# Altium PCB CPU01(2).PcbDoc (part 2 of 2)
Units mm, origin at the board's own origin, x right, y up, seen from the top; angles counter-clockwise.
Board outline 153.03 x 96.97 mm, 4 copper layers (Top Layer, GND, VCC, Bottom Layer), stack 0.778 mm thick; 203 components, 157 nets, 813 pads, 622 vias.
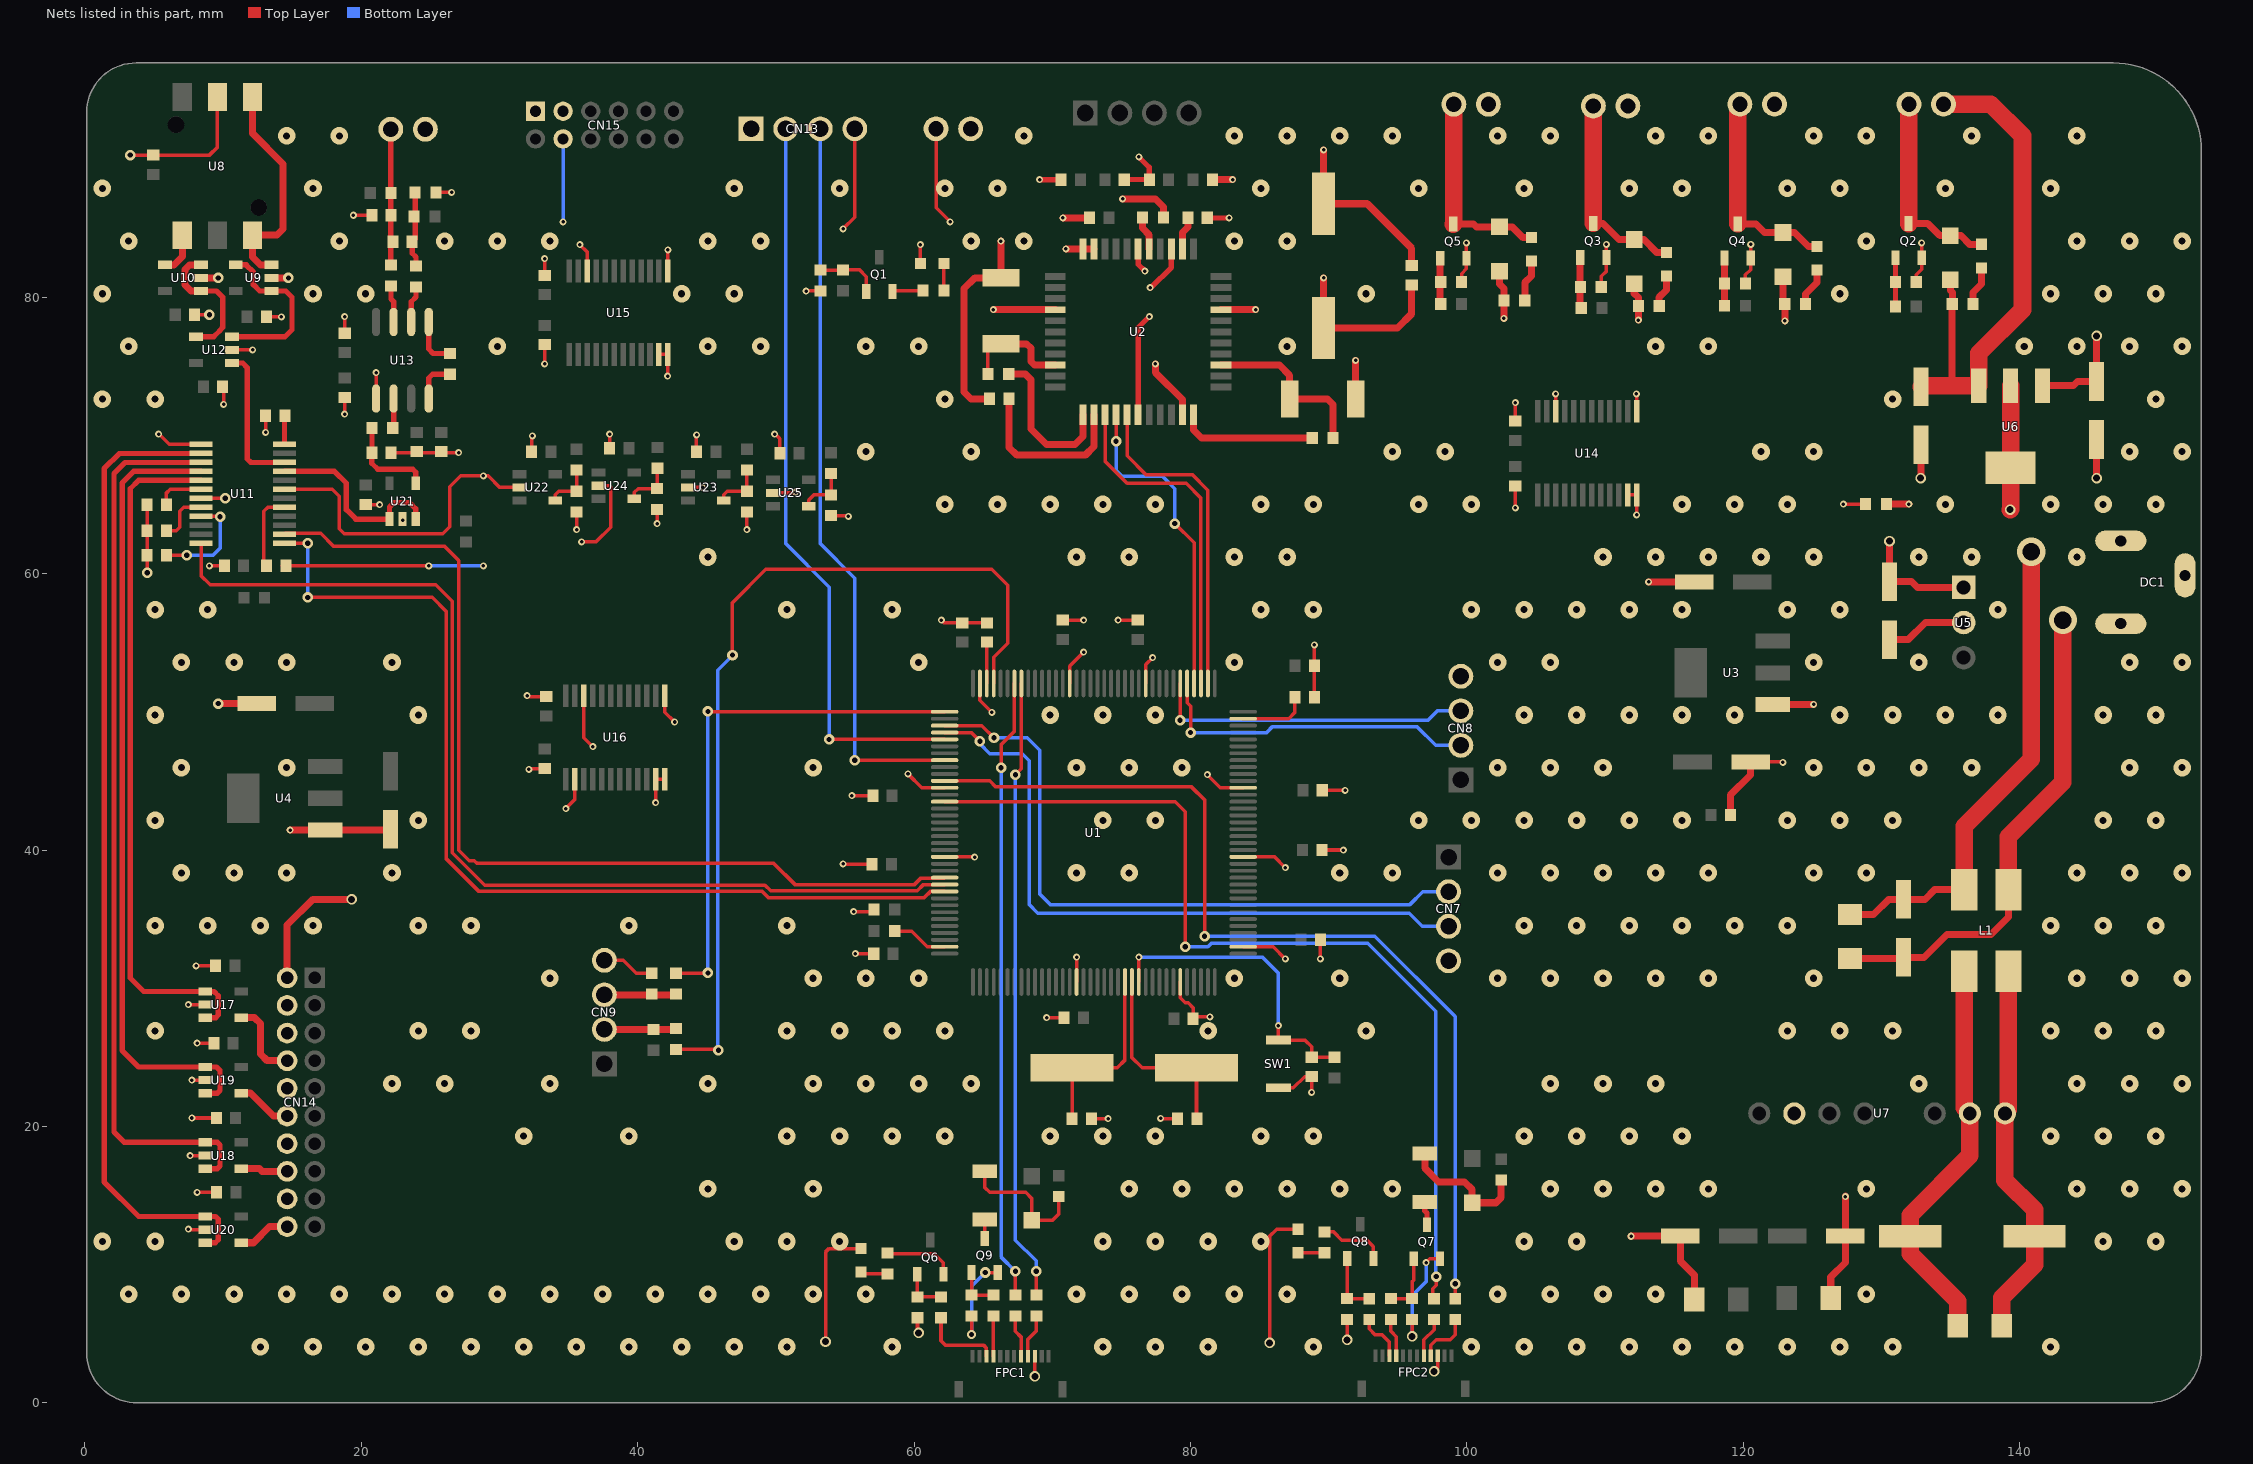
[diagram p4: the nets of this part, all layers, seen from the top]

## Via types
v1: diameter 1.27, hole 0.508, Top Layer to Bottom Layer, 360 vias
v2: diameter 0.508, hole 0.254, Top Layer to Bottom Layer, 161 vias
v3: diameter 0.762, hole 0.381, Top Layer to Bottom Layer, 79 vias
v4: diameter 0.762, hole 0.508, Top Layer to Bottom Layer, 16 vias
v5: diameter 2.032, hole 1.27, Top Layer to Bottom Layer, 4 vias
v6: diameter 1.016, hole 0.381, Top Layer to Bottom Layer, 1 vias
v7: diameter 0.635, hole 0.381, Top Layer to Bottom Layer, 1 vias

## Nets (pads, with @x,y where several pads share a name; then routed paths per layer and width w, separated by ;. In a path a pad name is that pad's centre, name@x,y a point inside that pad or via, vN(x,y) a via of type N, cw(c..) or ccw(c..) an arc to the next point about the centre after c; other vN are vias at no path point) (continued)
DGND: C1.2 C2.2 C3.2 C4.2 C5.2 C6.2 C7.2 C8.2 C9.2 C10.2 C11.2 C12.2 C13.2 C14.2 C15.2 C16.2 C17.2 C28.2 C30.2 C32.2 C35.2 C62.1 C63.2 C64.1 C65.2 C66.1 C67.2 C72.1 C73.1 C74.1 C75.1 CN7.4 CN8.4 CN9.4 CN12.1 CN13.4 CN14.2 CN15.8 FPC1.3 FPC2.3 LED1.1 LED2.1 LED3.1 Q7.2 Q9.2 R2.2 R8.1 R10.1 R28.2 R43.1 R47.1 R53.1 R55.1 R57.1 R58.1 R61.1 R62.1 SW1.1 U1.16 U1.31 U1.38 U1.51 U1.61 U1.83 U1.94 U1.107 U1.120 U1.130 U3.1 U11.7 U14.11 U14.12 U14.13 U14.22 U15.11 U15.12 U15.13 U15.22 U16.2 U16.11 U16.12 U16.13 U16.22 U22.2 U23.2 U24.2 U25.2 | length 234.2
  Top Layer w0.254: C35.2@14.289,60.579 C35.2@14.543,60.579 v2(24.884,60.579) ; U11.7@14.453,66.111 17.901,66.111 18.402,65.61 18.402,63.27 18.782,62.89 25.908,62.89 26.416,63.398 26.416,66.294 27.209,67.087 v2(28.829,67.087) 29.179,67.087 30.019,66.247 U22.2@31.444,66.247 ; v2(32.004,51.181) 32.066,51.119 C63.2@33.401,51.119 ; v2(32.131,45.847) 32.069,45.909 C62.1@33.274,45.909 ; C72.1@32.32,68.834 32.32,69.912 v2(32.385,69.977) ; v2(33.274,75.184) C66.1@33.274,76.581 ; C67.2@33.274,81.599 v2(33.274,82.804) ; v2(34.805,43.014) 35.455,43.664 U16.2@35.455,45.136 ; v2(35.585,63.195) R57.1@35.585,64.462 ; v2(35.814,83.82) 36.344,83.29 U15.22@36.344,81.915 ; v2(35.941,62.303) 36.979,62.303 38.055,63.379 38.055,66.294 37.975,66.374 U24.2@37.159,66.374 ; U16.22@36.105,51.181 36.105,48.133 36.74,47.498 v2(36.755,47.498) ; CN9.4@37.592,32.035 38.958,32.035 39.894,31.099 R8.1@41.021,31.099 ; C74.1@37.97,69.088 37.97,70.101 v2(37.973,70.104) ; v2(41.305,43.434) U16.11@41.305,45.136 U16.12@41.955,45.136 ; v2(41.402,63.627) R61.1@41.402,64.661 ; U15.11@41.544,75.87 U15.12@42.194,75.87 42.194,74.338 v2(42.164,74.308) ; U16.13@41.955,51.181 41.955,49.993 v2(42.672,49.276) ; U15.13@42.194,81.915 v2(42.194,83.439) ; U23.2@43.636,66.247 v2(44.704,66.247) ; C73.1@44.258,68.834 44.258,70.048 v2(44.263,70.053) ; v2(47.904,63.19) R58.1@47.904,64.462 ; U25.2@49.784,65.847 51.369,65.847 v2(51.435,65.913) ; v2(49.911,70.104) 49.973,70.104 50.289,69.788 C75.1@50.289,68.707 ; v2(52.197,80.457) 52.204,80.464 R10.1@53.238,80.464 ; v4(53.594,4.445) 53.594,10.922 53.848,11.176 LED2.1@56.159,11.176 ; R62.1@54,64.208 55.198,64.208 v2(55.245,64.161) ; v2(54.864,39.014) 54.889,38.989 C16.2@56.958,38.989 ; v2(54.864,84.963) 55.713,85.812 CN13.4@55.713,92.202 ; v2(55.499,43.942) C15.2@57.02,43.942 ; v2(55.626,35.56) 55.626,35.539 R2.2@57.094,35.539 ; v2(55.753,32.512) 55.755,32.514 C17.2@57.085,32.514 ; v2(59.563,45.514) 60.563,44.514 U1.120@62.214,44.514 ; R43.1@60.251,6.169 60.251,5.154 v4(60.325,5.08) ; LED1.1@60.452,82.448 v2(60.452,83.82) ; CN12.1@61.595,92.202 61.595,86.487 v2(62.611,85.471) ; v2(61.976,56.642) 62.165,56.453 C14.2@63.5,56.453 C4.2@65.278,56.453 ; U1.130@62.214,39.514 64.372,39.514 v2(64.389,39.497) ; v7(64.16,4.953) R55.1@64.16,6.296 ; U1.107@64.764,52.064 64.764,50.846 v2(65.637,49.973) ; v3(65.151,9.441) Q9.2@66.062,9.441 ; v4(68.742,1.927) FPC1.3@68.742,3.381 ; v2(69.596,27.879) C6.2@70.866,27.879 ; C13.2@70.764,56.645 v2(72.266,56.645) ; U1.94@71.264,52.064 71.264,53.326 v2(72.266,54.328) ; U1.16@71.764,30.464 v2(71.764,32.258) ; C2.2@72.836,20.574 74.038,20.574 v2(74.041,20.577) ; v2(74.764,56.642) 74.767,56.645 C12.2@76.2,56.645 ; U1.83@76.764,52.064 76.764,53.433 v2(77.264,53.933) ; v2(77.851,20.599) 77.876,20.574 C3.2@79.064,20.574 ; U1.31@79.264,30.464 79.264,29.321 79.629,28.956 79.838,28.956 80.188,28.606 80.188,28.587 80.202,28.573 80.202,27.94 v2(81.407,27.94) ; v2(81.218,45.466) 82.17,44.514 U1.61@83.814,44.514 ; U1.38@83.814,33.014 85.981,33.014 v2(86.864,32.131) ; U1.51@83.814,39.514 86.085,39.514 v2(86.864,38.735) ; v4(85.725,4.345) 85.725,12.065 86.233,12.573 LED3.1@87.782,12.573 ; SW1.1@86.36,22.81 87.453,22.81 88.262,23.619 C1.2@88.773,23.619 v2(88.773,22.479) ; C5.2@88.965,51.054 88.965,54.861 v2(88.968,54.864) ; v2(89.408,32.131) 89.411,32.134 C8.2@89.411,33.514 ; C9.2@89.514,40.014 91.05,40.014 v2(91.059,40.005) ; C10.2@89.538,44.323 v2(91.186,44.323) ; v4(91.338,4.564) R53.1@91.338,6.042 ; v4(96.037,4.826) R47.1@96.037,6.042 ; v2(97.052,10.16) 97.322,10.43 Q7.2@98.066,10.43 ; v4(97.638,2.286) 97.893,2.541 FPC2.3@97.893,3.429 ; v2(103.505,64.77) C64.1@103.505,66.356 ; C65.2@103.505,71.058 v2(103.505,72.39) ; U14.22@106.433,71.755 v2(106.433,73.025) ; U14.11@111.633,65.71 U14.12@112.283,65.71 v2(112.283,64.262) ; v2(112.268,73.025) 112.283,73.01 U14.13@112.283,71.755 ; C32.2@120.535,46.383 122.848,46.383 v2(122.876,46.355) ; v2(127.254,65.049) R28.2@128.849,65.049
  Top Layer w0.508: CN14.2@14.637,30.765 14.637,34.576 16.51,36.449 v4(19.304,36.449) ; v2(113.157,59.422) 113.171,59.408 C28.2@116.447,59.408 ; C30.2@119.064,42.545 119.064,43.983 120.535,45.453 C32.2@120.535,46.383 ; U3.1@122.145,50.532 125.081,50.532 v2(125.095,50.546)
  Bottom Layer w0.254: v2(24.884,60.579) v2(28.829,60.579) ; v2(34.608,85.471) CN15.8@34.608,91.472 ; v7(64.16,4.953) 64.16,8.45 v3(65.151,9.441) ; v4(96.037,4.826) 96.037,7.772 97.052,8.787 v2(97.052,10.16)
  other v1: 12.7,4.064 16.51,4.064 20.32,4.064 24.13,4.064 27.94,4.064 31.75,4.064 35.56,4.064 39.37,4.064 43.18,4.064 46.99,4.064 50.8,4.064 58.42,4.064 73.66,4.064 77.47,4.064 81.28,4.064 88.9,4.064 100.33,4.064 104.14,4.064 107.95,4.064 111.76,4.064 115.57,4.064 119.38,4.064 123.19,4.064 127,4.064 130.81,4.064 142.24,4.064 3.175,7.874 6.985,7.874 10.795,7.874 14.605,7.874 18.415,7.874 22.225,7.874 26.035,7.874 29.845,7.874 33.655,7.874 37.465,7.874 41.275,7.874 45.085,7.874 48.895,7.874 52.705,7.874 56.515,7.874 71.755,7.874 75.565,7.874 79.375,7.874 83.185,7.874 86.995,7.874 102.235,7.874 106.045,7.874 109.855,7.874 113.665,7.874 128.905,7.874 1.27,11.684 5.08,11.684 46.99,11.684 50.8,11.684 54.61,11.684 73.66,11.684 77.47,11.684 81.28,11.684 85.09,11.684 104.14,11.684 107.95,11.684 146.05,11.684 149.86,11.684 45.085,15.494 52.705,15.494 75.565,15.494 79.375,15.494 83.185,15.494 86.995,15.494 90.805,15.494 94.615,15.494 106.045,15.494 109.855,15.494 113.665,15.494 117.475,15.494 128.905,15.494 144.145,15.494 147.955,15.494 151.765,15.494 31.75,19.304 39.37,19.304 50.8,19.304 54.61,19.304 58.42,19.304 62.23,19.304 69.85,19.304 73.66,19.304 77.47,19.304 85.09,19.304 88.9,19.304 104.14,19.304 107.95,19.304 111.76,19.304 115.57,19.304 142.24,19.304 146.05,19.304 149.86,19.304 22.225,23.114 26.035,23.114 33.655,23.114 45.085,23.114 52.705,23.114 56.515,23.114 60.325,23.114 64.135,23.114 106.045,23.114 109.855,23.114 113.665,23.114 132.715,23.114 144.145,23.114 147.955,23.114 151.765,23.114 5.08,26.924 24.13,26.924 27.94,26.924 50.8,26.924 54.61,26.924 58.42,26.924 62.23,26.924 81.28,26.924 92.71,26.924 123.19,26.924 127,26.924 130.81,26.924 142.24,26.924 146.05,26.924 149.86,26.924 33.655,30.734 52.705,30.734 56.515,30.734 60.325,30.734 83.185,30.734 90.805,30.734 102.235,30.734 106.045,30.734 109.855,30.734 113.665,30.734 117.475,30.734 125.095,30.734 144.145,30.734 147.955,30.734 151.765,30.734 5.08,34.544 8.89,34.544 12.7,34.544 16.51,34.544 24.13,34.544 27.94,34.544 39.37,34.544 50.8,34.544 104.14,34.544 107.95,34.544 111.76,34.544 115.57,34.544 119.38,34.544 123.19,34.544 142.24,34.544 146.05,34.544 149.86,34.544 6.985,38.354 10.795,38.354 14.605,38.354 22.225,38.354 71.755,38.354 75.565,38.354 90.805,38.354 94.615,38.354 102.235,38.354 106.045,38.354 109.855,38.354 113.665,38.354 117.475,38.354 125.095,38.354 128.905,38.354 144.145,38.354 147.955,38.354 151.765,38.354 5.08,42.164 24.13,42.164 73.66,42.164 77.47,42.164 96.52,42.164 100.33,42.164 104.14,42.164 107.95,42.164 111.76,42.164 115.57,42.164 123.19,42.164 127,42.164 130.81,42.164 146.05,42.164 149.86,42.164 6.985,45.974 14.605,45.974 52.705,45.974 71.755,45.974 75.565,45.974 79.375,45.974 102.235,45.974 106.045,45.974 109.855,45.974 125.095,45.974 128.905,45.974 132.715,45.974 136.525,45.974 147.955,45.974 151.765,45.974 5.08,49.784 24.13,49.784 69.85,49.784 73.66,49.784 77.47,49.784 104.14,49.784 107.95,49.784 111.76,49.784 115.57,49.784 119.38,49.784 127,49.784 130.81,49.784 134.62,49.784 138.43,49.784 146.05,49.784 149.86,49.784 6.985,53.594 10.795,53.594 14.605,53.594 22.225,53.594 60.325,53.594 83.185,53.594 102.235,53.594 106.045,53.594 125.095,53.594 132.715,53.594 147.955,53.594 151.765,53.594 5.08,57.404 8.89,57.404 50.8,57.404 58.42,57.404 85.09,57.404 88.9,57.404 100.33,57.404 104.14,57.404 107.95,57.404 111.76,57.404 115.57,57.404 123.19,57.404 127,57.404 138.43,57.404 45.085,61.214 71.755,61.214 75.565,61.214 83.185,61.214 86.995,61.214 109.855,61.214 113.665,61.214 117.475,61.214 121.285,61.214 125.095,61.214 132.715,61.214 136.525,61.214 144.145,61.214 62.23,65.024 66.04,65.024 69.85,65.024 73.66,65.024 77.47,65.024 85.09,65.024 88.9,65.024 96.52,65.024 100.33,65.024 115.57,65.024 119.38,65.024 123.19,65.024 134.62,65.024 142.24,65.024 146.05,65.024 149.86,65.024 56.515,68.834 64.135,68.834 94.615,68.834 98.425,68.834 121.285,68.834 125.095,68.834 147.955,68.834 151.765,68.834 1.27,72.644 5.08,72.644 62.23,72.644 130.81,72.644 149.86,72.644 3.175,76.454 29.845,76.454 45.085,76.454 48.895,76.454 56.515,76.454 60.325,76.454 86.995,76.454 113.665,76.454 117.475,76.454 140.335,76.454 144.145,76.454 147.955,76.454 151.765,76.454 1.27,80.264 16.51,80.264 20.32,80.264 43.18,80.264 46.99,80.264 92.71,80.264 127,80.264 142.24,80.264 146.05,80.264 149.86,80.264 3.175,84.074 18.415,84.074 26.035,84.074 29.845,84.074 33.655,84.074 45.085,84.074 48.895,84.074 64.135,84.074 67.945,84.074 83.185,84.074 86.995,84.074 128.905,84.074 144.145,84.074 147.955,84.074 151.765,84.074 1.27,87.884 16.51,87.884 46.99,87.884 54.61,87.884 62.23,87.884 66.04,87.884 85.09,87.884 96.52,87.884 104.14,87.884 111.76,87.884 115.57,87.884 123.19,87.884 127,87.884 134.62,87.884 142.24,87.884 14.605,91.694 18.415,91.694 67.945,91.694 83.185,91.694 86.995,91.694 90.805,91.694 94.615,91.694 102.235,91.694 106.045,91.694 113.665,91.694 117.475,91.694 125.095,91.694 128.905,91.694 136.525,91.694 144.145,91.694
Linght_AD1: CN14.8 U17.4 | length 5.9
  Top Layer w0.508: U17.4@11.311,27.879 12.276,27.879 12.7,27.455 12.7,25.261 13.196,24.765 CN14.8@14.637,24.765
Linght_AD1I: U11.17 U17.1 U17.3 | length 50.1
  Top Layer w0.381: U11.17@8.407,66.761 3.888,66.761 3.281,66.154 3.281,30.755 4.257,29.779 U17.1@8.711,29.779 9.337,29.779 9.652,29.464 9.652,28.067 9.464,27.879 U17.3@8.711,27.879
Linght_AD2: CN14.12 U19.4 | length 4
  Top Layer w0.508: U19.4@11.311,22.418 11.999,22.418 13.652,20.765 CN14.12@14.637,20.765
Linght_AD2I: U11.16 U19.1 U19.3 | length 57.4
  Top Layer w0.381: U11.16@8.407,67.411 3.53,67.411 2.697,66.578 2.697,25.497 3.876,24.318 U19.1@8.711,24.318 9.53,24.318 9.779,24.069 9.779,22.606 9.591,22.418 U19.3@8.711,22.418
Linght_AD3: CN14.16 U18.4 | length 3.4
  Top Layer w0.508: U18.4@11.311,16.957 12.634,16.957 12.826,16.765 CN14.16@14.637,16.765
Linght_AD3I: U11.15 U18.1 U18.3 | length 65
  Top Layer w0.381: U11.15@8.407,68.061 2.91,68.061 2.113,67.264 2.113,19.604 2.86,18.857 U18.1@8.711,18.857 9.591,18.857 9.779,18.669 9.779,17.145 9.591,16.957 U18.3@8.711,16.957
Linght_AD4: CN14.20 U20.4 | length 3.8
  Top Layer w0.508: U20.4@11.311,11.594 12.202,11.594 13.372,12.765 CN14.20@14.637,12.765
Linght_AD4I: U11.14 U20.1 U20.3 | length 71
  Top Layer w0.381: U11.14@8.407,68.711 2.498,68.711 1.397,67.61 1.397,16.002 3.904,13.495 U20.1@8.711,13.495 9.46,13.495 9.652,13.303 9.652,11.811 9.436,11.595 U20.3@8.711,11.595
NetBUZZER1_1: BUZZER1.1 D5.2 R40.1 | length 9.6
  Top Layer w0.508: BUZZER1.1@96.957,18.042 96.957,16.997 97.952,16.002 99.822,16.002 100.39,15.434 D5.2@100.39,14.488 102.118,14.488 102.489,14.859 R40.1@102.489,16.129
NetBUZZER1_2: BUZZER1.2 Q7.3 | length 1.7
  Top Layer w0.381: BUZZER1.2@96.957,14.542 96.957,13.914 97.116,13.755 Q7.3@97.116,12.9
NetBUZZER2_1: BUZZER2.1 D6.2 R49.1 | length 9.9
  Top Layer w0.254: BUZZER2.1@65.119,16.772 65.119,15.588 65.467,15.24 68.072,15.24 68.513,14.799 D6.2@68.513,13.218 70.02,13.218 70.472,13.67 R49.1@70.472,14.932
NetBUZZER2_2: BUZZER2.2 Q9.3 | length 1.4
  Top Layer w0.254: Q9.3@65.112,11.911 65.112,13.265 BUZZER2.2@65.119,13.272
NetC2_1: C2.1 U1.23 X1.2 | length 13.4
  Top Layer w0.254: C2.1@71.436,20.574 71.439,20.577 X1.2@71.439,24.257 74.704,24.257 75.264,24.817 U1.23@75.264,30.464
NetC3_1: C3.1 U1.24 X1.1 | length 14.1
  Top Layer w0.254: U1.24@75.764,30.464 75.764,24.999 76.506,24.257 X1.1@80.439,24.257 80.439,20.599 C3.1@80.464,20.574
NetC4_1: C4.1 U1.106 | length 3
  Top Layer w0.254: U1.106@65.264,52.064 65.264,55.039 C4.1@65.278,55.053
NetC5_1: C5.1 U1.71 | length 5
  Top Layer w0.254: U1.71@83.814,49.514 87.106,49.514 87.565,49.973 C5.1@87.565,51.054
NetC18_2: C18.2 U2.35 | length 2.4
  Top Layer w0.508: U2.35@79.419,83.508 79.419,84.699 79.818,85.098 C18.2@79.818,85.75
NetC23_2: C23.2 U2.13 | length 12.4
  Top Layer w0.508: C23.2@66.867,72.651 66.867,69.15 67.437,68.58 72.39,68.58 73.019,69.209 U2.13@73.019,71.508
NetC35_1: C35.1 U11.5 | length 5.6
  Top Layer w0.254: C35.1@13.146,60.579 12.954,60.771 12.954,64.516 13.249,64.811 U11.5@14.453,64.811
NetC43_1: C43.1 C44.2 L1.3 U7.2 | length 29
  Top Layer w1.27: C44.2@135.509,5.588 135.509,7.366 132.08,10.795 C43.1@132.08,12.065 132.08,13.589 136.398,17.907 U7.2@136.398,20.955 135.992,21.361 L1.3@135.992,31.242
NetC43_2: C43.2 C44.1 L1.4 U7.1 | length 27.6
  Top Layer w1.27: C44.1@138.694,5.588 138.694,7.63 141.08,10.016 C43.2@141.08,12.065 141.08,13.987 138.938,16.129 U7.1@138.938,20.955 139.192,21.209 L1.4@139.192,31.242
NetC51_2: C51.2 U11.20 | length 3.9
  Top Layer w0.254: C51.2@5.907,63.119 6.604,63.119 6.858,63.373 6.858,64.516 7.153,64.811 U11.20@8.407,64.811
NetC52_1: C52.1 U11.18 | length 3.4
  Top Layer w0.254: C52.1@5.907,65.01 5.907,65.851 6.167,66.111 U11.18@8.407,66.111
NetC57_1: C57.1 C59.1 CN11.1 R35.2 R36.1 | length 9.8
  Top Layer w0.381: CN11.1@22.136,92.168 22.136,82.357 R36.1@22.152,82.341
NetC57_2: C57.2 R34.2 R38.1 R39.1 | length 5.5
  Top Layer w0.381: R38.1@23.899,87.596 23.899,84.252 C57.2@23.687,84.04 23.687,83.192 23.956,82.923 R39.1@23.956,82.27
NetCN9_2: CN9.2 R4.1 R5.1 | length 5.1
  Top Layer w0.508: CN9.2@37.592,27.035 R4.1@41.148,27.035 R5.1@42.72,27.035
NetCN9_3: CN9.3 R7.1 R8.2 | length 5.1
  Top Layer w0.508: CN9.3@37.592,29.535 R7.1@42.716,29.535
NetFPC1_4: FPC1.4 R44.2 | length 3.2
  Top Layer w0.254: FPC1.4@68.242,3.381 68.242,4.615 68.86,5.233 R44.2@68.86,6.294
NetFPC1_5: FPC1.5 R45.2 | length 3.1
  Top Layer w0.254: R45.2@67.336,6.294 67.336,5.181 67.742,4.775 FPC1.5@67.742,3.381
NetFPC2_4: FPC2.4 R48.2 | length 3.9
  Top Layer w0.254: FPC2.4@97.393,3.429 97.393,4.175 97.79,4.572 98.806,4.572 99.162,4.928 R48.2@99.162,6.04
NetFPC2_5: FPC2.5 R50.2 | length 2.9
  Top Layer w0.254: FPC2.5@96.893,3.429 96.893,4.564 97.638,5.309 R50.2@97.638,6.04
NetLED1_2: LED1.2 R9.1 | length 2
  Top Layer w0.254: LED1.2@62.154,82.448 62.154,80.492 R9.1@62.157,80.489
NetLED2_2: LED2.2 R42.1 | length 2
  Top Layer w0.254: LED2.2@56.159,9.474 56.29,9.344 R42.1@58.064,9.344
NetLED3_2: LED3.2 R52.1 | length 1.9
  Top Layer w0.254: LED3.2@87.782,10.871 87.786,10.868 R52.1@89.687,10.868
NetQ1_1: Q1.1 R6.1 R10.2 | length 4.6
  Top Layer w0.254: R10.2@53.238,81.971 54.843,81.971 R6.1@54.864,81.991 56.058,81.991 56.542,81.507 Q1.1@56.542,80.434
NetQ1_2: Q1.2 R9.2 | length 2.2
  Top Layer w0.254: Q1.2@58.442,80.434 58.498,80.489 R9.2@60.65,80.489
NetQ2_1: Q2.1 R13.1 R15.1 | length 3.5
  Top Layer w0.381: R13.1@131.015,79.35 R15.1@131.015,81.128 Q2.1@131.015,82.872
NetQ3_1: Q3.1 R14.2 R16.1 | length 3.7
  Top Layer w0.508: Q3.1@108.204,82.88 108.204,79.294 R14.2@108.275,79.222
NetQ4_1: Q4.1 R19.2 R21.1 | length 3.5
  Top Layer w0.508: Q4.1@118.645,82.847 118.651,82.842 R19.2@118.651,79.397
NetQ5_1: Q5.1 R20.2 R22.1 | length 3.3
  Top Layer w0.508: R20.2@98.071,79.564 Q5.1@98.071,82.839
NetQ6_1: Q6.1 R41.1 R43.2 | length 3.3
  Top Layer w0.254: Q6.1@60.225,9.314 60.225,7.701 R43.2@60.251,7.676 60.252,7.674 R41.1@61.951,7.674
NetQ6_2: Q6.2 R42.2 | length 5.2
  Top Layer w0.254: R42.2@58.064,10.851 58.12,10.795 61.468,10.795 62.125,10.138 Q6.2@62.125,9.314
NetQ7_1: Q7.1 R46.1 R47.2 | length 4.5
  Top Layer w0.254: R46.1@94.512,7.549 R47.2@96.037,7.549 96.037,8.763 96.166,8.892 Q7.1@96.166,10.43
NetQ8_1: Q8.1 R51.1 R53.2 | length 4.5
  Top Layer w0.254: Q8.1@91.34,10.457 91.338,10.455 R53.2@91.338,7.549 91.34,7.547 R51.1@92.939,7.547
NetQ8_2: Q8.2 R52.2 | length 4.9
  Top Layer w0.254: R52.2@89.687,12.375 90.368,12.375 90.959,11.784 92.775,11.784 93.24,11.318 Q8.2@93.24,10.457
NetQ9_1: Q9.1 R54.1 R55.2 | length 3.2
  Top Layer w0.254: Q9.1@64.162,9.441 64.16,9.439 R55.2@64.16,7.803 64.162,7.801 R54.1@65.761,7.801
NetR3_2: R3.2 U1.143 | length 4.1
  Top Layer w0.254: R3.2@58.603,34.138 59.842,34.138 60.966,33.014 U1.143@62.214,33.014
NetR11_1: R11.1 RLED1.2 | length 2.4
  Top Layer w0.508: R11.1@113.919,79.375 113.919,80.01 114.452,80.543 RLED1.2@114.452,81.559
NetR12_1: R12.1 RLED2.2 | length 2.9
  Top Layer w0.508: R12.1@136.63,79.527 136.63,80.369 137.236,80.975 RLED2.2@137.236,82.144
NetR17_1: R17.1 RLED3.2 | length 2.8
  Top Layer w0.508: R17.1@124.514,79.527 124.514,80.256 125.349,81.091 RLED3.2@125.349,81.991
NetR18_1: R18.1 RLED4.2 | length 3
  Top Layer w0.508: R18.1@104.194,79.774 104.194,81.072 104.673,81.552 RLED4.2@104.673,82.619
NetR23_2: R23.2 U2.38 | length 2.5
  Top Layer w0.508: R23.2@76.534,85.775 76.534,85.01 77.019,84.525 U2.38@77.019,83.508
NetR24_1: R24.1 R25.2 U2.9 | length 8.3
  Top Layer w0.254: R25.2@65.349,74.447 65.349,76.638 R24.1@66.29,76.638
  Top Layer w0.508: R24.1@66.29,76.638 68.142,76.638 68.453,76.327 68.453,75.371 68.716,75.108 U2.9@70.219,75.108
NetR25_1: R25.1 U2.12 | length 11.4
  Top Layer w0.508: R25.1@66.856,74.447 68.047,74.447 68.453,74.041 68.453,70.485 69.596,69.342 71.64,69.342 72.219,69.921 U2.12@72.219,71.508
NetR26_1: R26.1 R27.2 U2.25 | length 12.7
  Top Layer w0.508: U2.25@82.219,75.108 86.436,75.108 87.179,74.365 R26.1@87.179,72.648 89.912,72.648 90.321,72.239 R27.2@90.321,69.825
NetR27_1: R27.1 U2.22 | length 9.9
  Top Layer w0.508: U2.22@80.219,71.508 80.219,70.403 80.797,69.825 R27.1@88.814,69.825
NetR31_1: R31.1 U11.21 | length 7.8
  Top Layer w0.254: R31.1@5.907,61.341 v3(7.366,61.341) ; U11.21@8.407,64.161 9.756,64.161 v3(9.782,64.135)
  Bottom Layer w0.254: v3(7.366,61.341) 9.274,61.341 9.782,61.849 v3(9.782,64.135)
NetR32_1: R32.1 R57.2 U22.4 | length 3.6
  Top Layer w0.254: U22.4@34.044,65.297 34.044,65.728 34.285,65.969 R57.2@35.585,65.969 R32.1@35.585,67.51
NetR33_1: R33.1 U13.8 | length 3.1
  Top Layer w0.381: U13.8@24.884,72.68 24.884,74.16 25.164,74.44 R33.1@26.416,74.44
NetR33_2: R33.2 U13.1 | length 3.6
  Top Layer w0.381: U13.1@24.884,78.225 24.884,76.263 25.201,75.946 R33.2@26.416,75.946
NetR36_2: R36.2 U13.3 | length 2.7
  Top Layer w0.381: R36.2@22.152,80.834 22.152,79.891 22.344,79.699 U13.3@22.344,78.225
NetR37_1: R37.1 U13.6 | length 2.2
  Top Layer w0.381: R37.1@22.279,70.536 22.344,70.601 U13.6@22.344,72.68
NetR39_2: R39.2 U13.2 | length 2.7
  Top Layer w0.381: U13.2@23.614,78.225 23.614,79.683 23.956,80.025 R39.2@23.956,80.763
NetR56_1: R56.1 R58.2 U23.4 | length 3.7
  Top Layer w0.254: U23.4@46.236,65.297 46.236,65.722 46.482,65.969 R58.2@47.904,65.969 R56.1@47.904,67.51
NetR59_1: R59.1 R61.2 U24.4 | length 3.7
  Top Layer w0.254: U24.4@39.759,65.424 39.759,65.89 40.036,66.167 R61.2@41.402,66.167 41.402,67.587 R59.1@41.452,67.637
NetR60_1: R60.1 R62.2 U25.4 | length 3.8
  Top Layer w0.254: U25.4@52.384,64.897 52.384,65.338 52.761,65.715 R62.2@54,65.715 R60.1@54,67.256
NRST: C1.1 R1.1 SW1.2 U1.25 | length 22.2
  Top Layer w0.254: U1.25@76.264,30.464 v2(76.264,32.258) ; v2(86.36,27.305) SW1.2@86.36,26.26 88.294,26.26 88.773,25.781 C1.1@88.773,25.019 R1.1@90.424,25.019
  Bottom Layer w0.254: v2(76.264,32.258) 85.217,32.258 86.36,31.115 v2(86.36,27.305)
P+5V: C37.1 CN5.1 D2.1 R12.2 U6.3 | length 38
  Top Layer w0.508: D2.1@134.992,81.27 134.992,80.505 135.128,80.369 135.128,79.532 R12.2@135.123,79.527 135.123,73.736 135.001,73.614
  Top Layer w1.27: C37.1@132.87,73.53 132.954,73.614 135.001,73.614 U6.3@137.046,73.614 137.046,75.959 140.208,79.121 140.208,91.694 137.922,93.98 CN5.1@134.493,93.98
P+12V: C18.1 C19.1 C20.1 C27.1 C34.1 C40.1 C42.2 CN3.1 CN4.1 CN6.1 CN12.2 CN13.1 CN15.1 D1.1 D3.1 D4.1 DC1.1 L1.2 R11.2 R17.2 R18.2 U2.4 U2.30 U2.36 U5.1 U6.1 | length 85.7
  Top Layer w0.381: v2(77.089,80.708) 77.152,80.708 78.619,82.175 U2.36@78.619,83.508 ; C18.1@81.218,85.75 v2(82.804,85.75)
  Top Layer w0.508: v2(65.742,79.121) 70.206,79.121 U2.4@70.219,79.108 ; U2.30@82.219,79.108 84.696,79.108 v2(84.709,79.121) ; v2(89.63,90.678) C19.1@89.63,86.777 92.791,86.777 96.012,83.556 C20.1@96.012,82.296 ; D4.1@102.362,81.907 102.362,80.962 102.687,80.637 R18.2@102.687,79.774 v2(102.687,78.486) ; D1.1@112.114,80.988 112.114,80.291 112.413,79.992 R11.2@112.413,79.375 v2(112.413,78.359) ; D3.1@122.876,81.499 122.876,79.659 R17.2@123.007,79.527 v2(123.007,78.308) ; C42.2@127.736,35.347 129.429,35.347 130.528,36.446 C40.1@131.6,36.446 133.163,36.446 133.859,37.142 L1.2@135.992,37.142 ; v4(130.584,62.357) C27.1@130.584,59.433 132.182,59.433 132.602,59.013 U5.1@135.951,59.013 ; U6.1@141.646,73.614 143.896,73.614 144.193,73.911 C34.1@145.57,73.911 v4(145.57,77.216)
  Top Layer w1.27: L1.2@135.992,37.142 135.992,41.719 140.843,46.57 v5(140.843,61.595)
PGND: C19.2 C20.2 C21.1 C22.1 C23.1 C24.1 C25.2 C26.1 C27.2 C34.2 C37.2 C40.2 C42.1 CN15.2 DC1.2 DC1.3 L1.1 Q2.2 Q3.2 Q4.2 Q5.2 R15.2 R16.2 R21.2 R22.2 R23.1 R24.2 R26.2 R28.1 U2.17 U2.21 U2.39 U2.43 U2.44 U5.2 U6.2 U6.4 | length 128.6
  Top Layer w0.254: R22.2@99.624,81.12 99.624,81.717 99.971,82.064 Q5.2@99.971,82.839 v2(99.971,83.947) ; R16.2@109.728,80.754 109.728,81.526 110.104,81.902 Q3.2@110.104,82.88 v2(110.104,83.845) ; R21.2@120.159,80.998 120.159,81.627 120.545,82.014 Q4.2@120.545,82.847 v2(120.545,83.845) ; R15.2@132.522,81.128 132.522,81.65 132.915,82.044 Q2.2@132.915,82.872 v2(132.915,83.947)
  Top Layer w0.381: v2(69.088,88.524) 69.093,88.519 C21.1@70.634,88.519 ; C22.1@75.212,88.524 77.019,88.524 C24.1@77.024,88.519 77.024,89.41 v2(76.264,90.17) ; U2.17@76.219,71.508 76.219,77.808 v2(77.024,78.613) ; U2.39@76.219,83.508 76.219,82.396 v2(76.708,81.907)
  Top Layer w0.508: C23.1@65.467,72.651 64.128,72.651 63.627,73.152 63.627,80.645 64.403,81.421 R24.2@66.29,81.421 v2(66.29,84.074) ; v2(70.764,85.75) 72.681,85.75 C25.2@72.706,85.775 ; v2(70.993,83.508) U2.44@72.219,83.508 U2.43@73.019,83.508 ; v2(75.095,87.122) 77.47,87.122 78.041,86.551 R23.1@78.041,85.775 ; v2(77.47,75.184) 77.47,74.549 79.419,72.6 U2.21@79.419,71.508 ; C26.1@81.599,88.524 v2(83.058,88.524) ; v2(89.63,81.407) C19.2@89.63,77.777 94.973,77.777 96.012,78.816 C20.2@96.012,80.896 ; v2(91.948,75.438) 91.962,75.424 R26.2@91.962,72.648 ; C42.1@127.736,32.162 131.516,32.162 C40.2@131.6,32.246 133.084,32.246 134.747,33.909 137.922,33.909 139.192,35.179 L1.1@139.192,37.142 ; R28.1@130.356,65.049 v2(131.991,65.049) ; C27.2@130.584,55.233 131.941,55.233 133.181,56.473 U5.2@135.951,56.473 ; v4(132.842,66.929) 132.87,66.957 C37.2@132.87,69.33 ; v4(145.57,66.929) C34.2@145.57,69.711
  Top Layer w1.27: L1.1@139.192,37.142 139.192,40.982 143.129,44.919 v5(143.129,56.642) ; v4(139.319,64.643) 139.346,64.67 U6.4@139.346,67.674 U6.2@139.346,73.614
Press_ADI: U11.10 U12.1 | length 10.6
  Top Layer w0.381: U12.1@10.651,75.25 11.426,75.25 11.746,74.93 11.746,68.326 12.011,68.061 U11.10@14.453,68.061
Press_Out+: U8.3 U10.4 | length 3.1
  Top Layer w0.508: U10.4@5.803,82.357 6.462,82.357 7.056,82.951 U8.3@7.056,84.504
Press_Out-: U8.1 U8.6 U9.3 | length 16
  Top Layer w0.508: U8.6@12.136,94.504 12.136,91.877 14.351,89.662 14.351,84.963 13.892,84.504 U8.1@12.136,84.504 12.136,82.936 12.715,82.357 U9.3@13.514,82.357
Press_OutL+: U10.1 U10.3 U12.4 | length 9.9
  Top Layer w0.381: U12.4@8.052,77.15 9.319,77.15 9.758,77.589 9.758,77.613 9.971,77.826 9.971,80.016 9.53,80.457 U10.1@8.403,80.457
  Top Layer w0.508: U10.1@8.403,80.457 7.681,80.457 7.239,80.899 7.239,82.016 7.58,82.357 U10.3@8.403,82.357
Press_OutL-: U9.1 U9.4 U12.3 | length 12.5
  Top Layer w0.381: U12.3@10.652,77.15 14.474,77.15 14.986,77.662 14.986,80.01 14.539,80.457 U9.1@13.514,80.457 12.657,80.457 12.192,80.922 12.192,81.835 11.67,82.357 U9.4@10.914,82.357
PUMB_Con1: CN5.2 D2.2 Q2.3 RLED2.1 | length 14.5
  Top Layer w0.508: Q2.3@131.965,85.342 133.352,85.342 134.224,84.47 D2.2@134.992,84.47 135.748,84.47 136.373,83.845 RLED2.1@137.236,83.845
  Top Layer w1.27: Q2.3@131.965,85.342 131.965,93.954 CN5.2@131.991,93.98
REF_2.5V_1: C53.1 U11.12 | length 2.1
  Top Layer w0.381: U11.12@14.453,69.361 14.453,71.397 C53.1@14.481,71.425
Sca_BUZZ1: FPC1.9 R54.2 | length 2.9
  Top Layer w0.254: FPC1.9@65.742,3.381 65.742,6.276 R54.2@65.761,6.294
Sca_BUZZ2: FPC2.9 R46.2 | length 2.8
  Top Layer w0.254: R46.2@94.512,6.042 94.512,5.183 94.893,4.802 FPC2.9@94.893,3.429
Sca_LED1: FPC1.10 R41.2 | length 5.8
  Top Layer w0.254: R41.2@61.951,6.167 61.951,4.495 62.255,4.191 65.024,4.191 65.242,3.973 FPC1.10@65.242,3.381
Sca_LED2: FPC2.10 R51.2 | length 3.5
  Top Layer w0.254: R51.2@92.939,6.04 92.939,5.359 93.345,4.953 93.853,4.953 94.393,4.413 FPC2.10@94.393,3.429
SPI1_CLK: U1.133 U11.2 | length 70.8
  Top Layer w0.254: U11.2@14.453,62.861 14.514,62.922 17.069,62.922 18.015,61.976 26.035,61.976 27.051,60.96 27.051,40.005 27.813,39.243 28.182,39.243 28.386,39.04 49.86,39.04 51.384,37.516 60.034,37.516 60.502,37.984 62.184,37.984 U1.133@62.214,38.014
SPI1_MISO: U1.134 U11.24 | length 76.4
  Top Layer w0.254: U11.24@8.407,62.211 8.407,59.854 9.065,59.196 25.4,59.196 26.594,58.002 26.594,39.816 28.938,37.471 49.211,37.471 49.624,37.059 60.223,37.059 60.649,37.484 62.184,37.484 U1.134@62.214,37.514
SPI1_MOSI: U1.135 U11.1 | length 71.3
  Top Layer w0.254: U11.1@14.453,62.211 v3(16.129,62.211) ; v3(16.129,58.293) 25.138,58.293 26.137,57.295 26.137,39.395 28.518,37.014 49.022,37.014 49.46,36.576 60.751,36.576 61.189,37.014 U1.135@62.214,37.014
  Bottom Layer w0.254: v3(16.129,58.293) v3(16.129,62.211)
SPI2_CLK: U1.74 U2.16 | length 23.8
  Top Layer w0.254: U2.16@75.419,71.508 75.419,68.531 76.767,67.183 80.129,67.183 81.264,66.048 U1.74@81.264,52.064
SPI2_MISO: U1.75 U2.14 | length 24.8
  Top Layer w0.254: U2.14@73.819,71.508 73.819,68.141 75.412,66.548 79.691,66.548 80.764,65.475 U1.75@80.764,52.064
SPI2_MOSI: U1.76 U2.15 | length 23.5
  Top Layer w0.254: v3(74.619,69.596) U2.15@74.619,71.508 ; v3(78.867,63.635) 80.264,62.238 U1.76@80.264,52.064
  Bottom Layer w0.254: v3(74.619,69.596) 74.619,67.494 75.057,67.056 77.978,67.056 78.867,66.167 v3(78.867,63.635)
SWCLK: R7.2 U1.109 | length 38.4
  Top Layer w0.254: R7.2@42.774,31.099 45.069,31.099 v3(45.085,31.115) ; v3@45.085,50.014 U1.109@62.214,50.014
  Bottom Layer w0.254: v3(45.085,31.115) v3(45.085,50.038)
SWDIO: R5.2 U1.105 | length 64.9
  Top Layer w0.254: R5.2@42.774,25.582 45.792,25.582 v3(45.847,25.527) ; v3(46.863,54.117) 46.863,57.912 49.273,60.322 65.637,60.322 66.777,59.182 66.777,54.966 65.764,53.953 U1.105@65.764,52.064
  Bottom Layer w0.254: v3(45.847,25.527) 45.796,25.578 45.796,44.618 45.791,44.622 45.791,49.612 45.796,49.616 45.796,50.46 45.791,50.464 45.791,53.03 v3@46.87,54.109
Tap_Con1: CN3.2 D3.2 Q4.3 RLED3.1 | length 15.2
  Top Layer w0.508: Q4.3@119.595,85.317 120.931,85.317 121.549,84.699 D3.2@122.876,84.699 123.708,84.699 124.714,83.693 RLED3.1@125.349,83.693
  Top Layer w1.27: Q4.3@119.595,85.317 119.595,93.814 CN3.2@119.761,93.98
Tap_Con2: CN6.2 D4.2 Q5.3 RLED4.1 | length 14.7
  Top Layer w0.508: Q5.3@99.021,85.309 100.484,85.309 100.686,85.107 D4.2@102.362,85.107 103.288,85.107 104.075,84.32 RLED4.1@104.673,84.32
  Top Layer w1.27: Q5.3@99.021,85.309 99.06,85.348 CN6.2@99.06,93.972
Temp_AD: C58.2 R37.2 U21.4 | length 6.8
  Top Layer w0.381: R37.2@20.772,70.536 20.772,68.763 C58.2@20.763,68.754 20.763,68.002 21.201,67.564 23.723,67.564 23.937,67.35 U21.4@23.937,66.556
Temp_ADI: U11.9 U21.1 U21.3 | length 14
  Top Layer w0.381: U11.9@14.453,67.411 18.06,67.411 18.923,66.548 18.923,64.643 19.61,63.956 U21.1@22.037,63.956 22.037,64.836 22.352,65.151 23.495,65.151 23.937,64.709 U21.3@23.937,63.956
TEMP_Channel1-: C29.2 C31.2 C33.2 C38.2 C39.1 C45.2 C46.1 C47.1 C48.1 C49.1 C50.1 C51.1 C52.2 C53.2 C54.1 C55.1 C56.1 C58.1 C59.2 C60.2 C61.2 C68.1 C69.1 C70.1 C71.1 CN11.2 CN14.4 CN14.6 CN14.10 CN14.14 CN14.18 R31.2 R38.2 U4.1 U7.7 U8.5 U9.2 U10.2 U11.13 U11.19 U12.2 U13.5 U17.2 U18.2 U19.2 U20.2 U21.2 | length 79.3
  Top Layer w0.254: v3(3.281,90.297) 3.284,90.3 C49.1@4.953,90.3 9.02,90.3 9.596,90.876 U8.5@9.596,94.504 ; v3(4.507,60.071) R31.2@4.507,61.341 C51.1@4.507,63.119 C52.2@4.507,65.01 ; v2(5.334,70.104) 5.372,70.104 6.115,69.361 U11.13@8.407,69.361 ; v2(7.493,12.573) 7.521,12.545 U20.2@8.711,12.545 ; v2(7.493,28.829) U17.2@8.711,28.829 ; v2(7.62,17.907) U18.2@8.711,17.907 ; v2(7.747,20.621) C68.1@9.512,20.621 ; v2(7.747,23.368) U19.2@8.711,23.368 ; C48.1@7.939,78.74 v3(9.017,78.74) ; v2(8.052,31.623) C70.1@9.46,31.623 ; v2(8.128,15.24) C71.1@9.522,15.24 ; v2(8.128,26.035) C69.1@9.333,26.035 ; U11.19@8.407,65.461 v3(10.16,65.461) ; v2(9.017,60.579) C31.2@9.841,60.579 ; C50.1@9.971,73.533 10.033,73.471 v2(10.033,72.263) ; U12.2@10.651,76.2 11.811,76.2 v2(12.136,76.2) ; v2(13.081,70.234) C53.2@13.081,71.425 ; C47.1@13.146,78.594 v2(14.224,78.594) ; v2(18.796,71.546) C61.2@18.796,72.768 ; C60.2@18.796,77.408 v2(18.796,78.613) ; v2(19.431,85.945) C59.2@20.763,85.945 ; C54.1@20.32,65.01 v2(21.336,65.01) v2@21.463,65.01 ; U13.5@21.074,72.68 21.074,74.541 v2(21.082,74.549) ; C58.1@22.163,68.754 27.042,68.754 v2(27.051,68.763) ; v2(22.987,63.881) U21.2@22.987,63.956 ; R38.2@25.406,87.596 v2(26.543,87.596)
  Top Layer w0.508: U10.2@8.403,81.407 v3(9.652,81.407) ; v3(9.652,50.613) C29.2@12.434,50.613 ; U9.2@13.514,81.407 v3(14.732,81.407) ; v2(14.859,41.456) U4.1@17.397,41.456 22.064,41.456 C33.2@22.126,41.517 ; v2(111.887,12.065) 111.915,12.093 C46.1@115.446,12.093 115.446,10.284 116.459,9.271 C45.2@116.459,7.493 ; C39.1@126.334,7.594 126.334,9.113 127.393,10.172 C38.2@127.393,12.093 v2(127.393,14.932) v2@127.393,14.986
Tmep_Ccon1: CN4.2 D1.2 Q3.3 RLED1.1 | length 14.7
  Top Layer w0.508: Q3.3@109.154,85.35 109.849,85.35 111.011,84.188 D1.2@112.114,84.188 112.815,84.188 113.741,83.261 RLED1.1@114.452,83.261
  Top Layer w1.27: Q3.3@109.154,85.35 CN4.2@109.154,93.853
UART4_RX: CN7.3 U1.112 | length 48.5
  Top Layer w0.254: U1.112@62.214,48.514 64.135,48.514 v3(64.77,47.879)
  Bottom Layer w0.254: v3(64.77,47.879) 64.77,47.711 65.491,46.99 67.818,46.99 68.326,46.482 68.326,36.068 68.961,35.433 95.834,35.433 96.773,34.494 CN7.3@98.679,34.494
UART4_TX: CN7.2 U1.111 | length 48.3
  Top Layer w0.254: U1.111@62.214,49.014 64.905,49.014 v3(65.786,48.133)
  Bottom Layer w0.254: v3(65.786,48.133) 68.199,48.133 69.088,47.244 69.088,36.83 69.85,36.068 95.885,36.068 96.811,36.994 CN7.2@98.679,36.994
UART5_RX: CN13.3 U1.116 | length 53.2
  Top Layer w0.254: v3(55.713,46.514) U1.116@62.214,46.514
  Bottom Layer w0.254: CN13.3@53.213,92.202 53.213,62.19 55.713,59.69 v3(55.713,46.514)
UART5_TX: CN13.2 U1.113 | length 53.8
  Top Layer w0.254: v3(53.848,48.014) U1.113@62.214,48.014
  Bottom Layer w0.254: CN13.2@50.713,92.202 50.713,62.19 53.869,59.034 ; v3(53.848,48.014) 53.848,59.013
USART1_RX: R45.1 U1.102 | length 45.4
  Top Layer w0.254: v3(66.294,45.974) 66.294,47.635 67.234,48.575 67.234,52.034 U1.102@67.264,52.064 ; R45.1@67.336,7.801 v3(67.336,9.525)
  Bottom Layer w0.254: v3(66.294,45.974) 66.294,10.567 v3(67.336,9.525) ; v3@67.264,9.271 v3@67.264,9.525
USART1_TX: R44.1 U1.101 | length 45.1
  Top Layer w0.254: v3(67.336,45.466) 67.764,45.894 U1.101@67.764,52.064 ; v3(68.834,9.525) 68.834,7.827 R44.1@68.86,7.801
  Bottom Layer w0.254: v3(67.336,45.466) 67.336,11.785 68.834,10.287 v3(68.834,9.525)
USART2_RX: R50.1 U1.122 | length 69.2
  Top Layer w0.254: U1.122@62.214,43.514 78.891,43.514 79.629,42.776 v3(79.629,33.02) ; R50.1@97.79,7.699 R50.1@97.638,7.547 97.536,7.649 97.536,8.255 97.79,8.509 v3(97.79,9.144)
  Bottom Layer w0.254: v3(79.629,33.02) 81.27,33.02 81.524,33.274 92.837,33.274 97.764,28.347 97.764,8.991 97.79,9.017 v3(97.79,9.144)
USART2_TX: R48.1 U1.119 | length 70.2
  Top Layer w0.254: U1.119@62.214,45.014 65.476,45.014 65.913,44.577 80.082,44.577 81.026,43.633 v3(81.026,33.782) ; R48.1@99.162,7.547 v3(99.162,8.636)
  Bottom Layer w0.254: v3(81.026,33.782) 93.345,33.782 99.162,27.965 v3(99.162,8.636)
USART3_RX: CN8.3 U1.78 | length 23.3
  Top Layer w0.254: v3(79.248,49.403) 79.264,49.419 U1.78@79.264,52.064
  Bottom Layer w0.254: v3(79.248,49.403) 97.192,49.403 97.874,50.085 CN8.3@99.568,50.085
USART3_TX: CN8.2 U1.77 | length 24
  Top Layer w0.254: U1.77@79.764,52.064 79.764,50.665 80.01,50.419 v3(80.01,48.514)
  Bottom Layer w0.254: v3(80.01,48.514) 85.511,48.514 85.943,48.946 96.379,48.946 97.74,47.585 CN8.2@99.568,47.585
pads on no net: CN14.7 CN14.9 CN14.11 CN15.11 FPC1.1 FPC1.6 FPC1.7 FPC1.8 FPC1.11 FPC1.12 FPC1.13 FPC1.14 FPC2.1 FPC2.6 FPC2.7 FPC2.8 FPC2.11 FPC2.12 FPC2.13 FPC2.14 SW1. U1.1 U1.2 U1.3 U1.4 U1.5 U1.7 U1.8 U1.9 U1.10 U1.11 U1.12 U1.13 U1.14 U1.15 U1.18 U1.19 U1.20 U1.21 U1.22 U1.26 U1.27 U1.28 U1.29 U1.34 U1.35 U1.36 U1.37 U1.40 U1.41 U1.42 U1.43 U1.44 U1.45 U1.46 U1.47 U1.48 U1.49 U1.50 U1.53 U1.54 U1.55 U1.56 U1.57 U1.58 U1.65 U1.66 U1.73 U1.79 U1.81 U1.82 U1.85 U1.86 U1.87 U1.88 U1.89 U1.90 U1.91 U1.92 U1.93 U1.96 U1.97 U1.110 U1.114 U1.115 U1.117 U1.118 U1.123 U1.136 U1.137 U1.139 U1.140 U1.141 U1.142 U2.1 U2.20 U2.33 U2.34 U2.37 U7.3 U7.5 U8. U8.4 U11.3 U11.8 U11.11 U14.7 U14.8 U14.9 U14.10 U14.14 U14.15 U14.16 U14.17 U15.8 U15.9 U15.10 U15.14 U15.15 U15.16 U16.9 U16.10 U16.14 U16.15

## Polygon pours and split planes (outlines as drawn)
no net on Top Layer "Top Layer-No Net" (solid, pour order 0): 3.683,96.012
DGND on Top Layer "Top Layer-DGND" (solid, pour order 2): 3.556,96.393 145.669,96.393 145.669,88.265 153.162,88.265 153.162,7.803 143.256,7.803 143.256,0 8.763,0 8.763,6.858 0,6.858 0,93.218 3.556,93.218
DGND on Bottom Layer "Bottom Layer-DGND" (solid, remove dead copper, pour order 4): 3.556,96.393 145.669,96.393 145.669,88.265 153.162,88.265 153.162,7.803 143.256,7.803 143.256,0 8.763,0 8.763,6.858 0,6.858 0,93.218 3.556,93.218
PGND on GND (split plane): 147.093,96.455 147.422,96.427 147.748,96.381 148.072,96.316 148.392,96.234 148.706,96.134 149.014,96.016 149.316,95.881 149.609,95.73 149.893,95.562 150.167,95.379 150.431,95.18 150.683,94.967 150.923,94.741 151.15,94.501 151.363,94.249 151.561,93.985 151.744,93.711 151.912,93.426 152.063,93.133 152.198,92.832 152.316,92.524 152.416,92.209 152.499,91.89 152.563,91.566 152.609,91.239 152.637,90.911 152.646,90.598 152.644,90.581 152.644,55.31 129.859,55.31 129.859,73.533 129.853,73.595 129.835,73.655 129.805,73.71 129.766,73.759 129.717,73.798 129.662,73.828 129.602,73.846 129.54,73.852 63.946,73.852 63.946,86.36 63.94,86.422 63.922,86.482 63.892,86.537 63.853,86.586 63.804,86.625 63.749,86.655 63.689,86.673 63.627,86.679 30.418,86.679 30.418,87.376 30.418,96.462 146.763,96.462 146.781,96.463
TEMP_Channel1- on GND (split plane): 3.716,96.462 27.494,96.462 27.494,57.215 17.78,57.215 17.718,57.209 17.658,57.191 17.603,57.161 17.554,57.122 17.515,57.073 17.485,57.018 17.467,56.958 17.461,56.896 17.461,17.907 17.467,17.845 17.485,17.785 17.515,17.73 17.554,17.681 17.603,17.642 17.658,17.612 17.718,17.594 17.78,17.588 117.602,17.588 117.664,17.594 117.724,17.612 117.779,17.642 117.828,17.681 117.867,17.73 117.897,17.785 117.915,17.845 117.921,17.907 117.921,22.922 130.11,22.922 130.11,6.161 0.637,6.161 0.637,93.383 0.636,93.399 0.645,93.625 0.673,93.865 0.72,94.102 0.786,94.335 0.87,94.562 0.971,94.782 1.089,94.993 1.224,95.194 1.373,95.384 1.538,95.561 1.715,95.726 1.905,95.875 2.106,96.01 2.317,96.128 2.537,96.229 2.764,96.313 2.997,96.379 3.234,96.426 3.474,96.454 3.7,96.463
DGND on GND (split plane): 29.78,87.376 29.78,86.36 29.786,86.298 29.804,86.238 29.834,86.183 29.873,86.134 29.922,86.095 29.977,86.065 30.037,86.047 30.099,86.041 63.308,86.041 63.308,73.533 63.314,73.471 63.332,73.411 63.362,73.356 63.401,73.307 63.45,73.268 63.505,73.238 63.565,73.22 63.627,73.214 129.221,73.214 129.221,54.991 129.227,54.929 129.245,54.869 129.275,54.814 129.314,54.765 129.363,54.726 129.418,54.696 129.478,54.678 129.54,54.672 152.644,54.672 152.644,3.866 152.645,3.851 152.637,3.628 152.612,3.391 152.57,3.157 152.511,2.926 152.435,2.7 152.344,2.479 152.238,2.266 152.116,2.061 151.98,1.866 151.831,1.68 151.668,1.506 151.494,1.343 151.308,1.194 151.112,1.058 150.907,0.936 150.694,0.83 150.474,0.738 150.248,0.663 150.017,0.604 149.783,0.562 149.546,0.536 149.323,0.529 149.308,0.53 149.208,0.52 149.176,0.51 3.81,0.51 3.793,0.509 3.561,0.518 3.313,0.547 3.069,0.596 2.829,0.663 2.595,0.75 2.369,0.854 2.151,0.976 1.944,1.114 1.748,1.269 1.565,1.438 1.396,1.621 1.241,1.817 1.103,2.024 0.981,2.242 0.877,2.468 0.79,2.702 0.723,2.942 0.674,3.186 0.645,3.434 0.636,3.666 0.637,3.683 0.637,5.523 130.429,5.523 130.491,5.529 130.551,5.547 130.606,5.577 130.655,5.616 130.694,5.665 130.724,5.72 130.742,5.78 130.748,5.842 130.748,23.241 130.742,23.303 130.724,23.363 130.694,23.418 130.655,23.467 130.606,23.506 130.551,23.536 130.491,23.554 130.429,23.56 117.602,23.56 117.54,23.554 117.48,23.536 117.425,23.506 117.376,23.467 117.337,23.418 117.307,23.363 117.289,23.303 117.283,23.241 117.283,18.226 18.099,18.226 18.099,56.577 27.813,56.577 27.875,56.583 27.935,56.601 27.99,56.631 28.039,56.67 28.078,56.719 28.108,56.774 28.126,56.834 28.132,56.896 28.132,96.462 29.78,96.462
P+12V on VCC (split plane): 147.093,96.455 147.422,96.427 147.748,96.381 148.072,96.316 148.392,96.234 148.706,96.134 149.014,96.016 149.316,95.881 149.609,95.73 149.893,95.562 150.167,95.379 150.431,95.18 150.683,94.967 150.923,94.741 151.15,94.501 151.363,94.249 151.561,93.985 151.744,93.711 151.912,93.426 152.063,93.133 152.198,92.832 152.316,92.524 152.416,92.209 152.499,91.89 152.563,91.566 152.609,91.239 152.637,90.911 152.646,90.598 152.644,90.581 152.644,58.739 129.224,58.739 129.224,77.089 129.218,77.151 129.2,77.211 129.17,77.266 129.131,77.315 129.082,77.354 129.027,77.384 128.967,77.402 128.905,77.408 72.582,77.408 72.582,87.596 72.576,87.658 72.558,87.718 72.528,87.773 72.489,87.821 72.44,87.861 72.385,87.89 72.325,87.909 72.263,87.915 66.675,87.915 66.613,87.909 66.553,87.89 66.498,87.861 66.449,87.821 66.41,87.773 66.38,87.718 66.362,87.658 66.356,87.596 66.356,78.043 63.946,78.043 63.946,86.36 63.94,86.422 63.922,86.482 63.892,86.537 63.853,86.586 63.804,86.625 63.749,86.655 63.689,86.673 63.627,86.679 30.545,86.679 30.545,96.462 146.763,96.462 146.781,96.463
D+5V on VCC (split plane): 71.944,77.089 71.95,77.027 71.968,76.967 71.998,76.912 72.037,76.863 72.086,76.824 72.141,76.794 72.201,76.776 72.263,76.77 128.586,76.77 128.586,58.42 128.592,58.358 128.61,58.298 128.64,58.243 128.679,58.194 128.728,58.155 128.783,58.125 128.843,58.107 128.905,58.101 152.644,58.101 152.644,42.991 118.81,42.991 118.81,68.58 118.804,68.642 118.786,68.702 118.756,68.757 118.717,68.806 118.668,68.845 118.613,68.875 118.553,68.893 118.491,68.899 54.61,68.899 54.548,68.893 54.488,68.875 54.433,68.845 54.384,68.806 54.345,68.757 54.315,68.702 54.297,68.642 54.291,68.58 54.291,67.375 30.545,67.375 30.545,86.041 63.308,86.041 63.308,77.724 63.314,77.662 63.332,77.602 63.362,77.547 63.401,77.498 63.45,77.459 63.505,77.429 63.565,77.411 63.627,77.405 66.675,77.405 66.737,77.411 66.797,77.429 66.852,77.459 66.901,77.498 66.94,77.547 66.97,77.602 66.988,77.662 66.994,77.724 66.994,87.277 71.944,87.277
D+3.3V on VCC (split plane): 118.172,42.672 118.178,42.61 118.196,42.55 118.226,42.495 118.265,42.446 118.314,42.407 118.369,42.377 118.429,42.359 118.491,42.353 152.644,42.353 152.644,3.866 152.645,3.851 152.637,3.628 152.612,3.391 152.57,3.157 152.511,2.926 152.435,2.7 152.344,2.479 152.238,2.266 152.116,2.061 151.98,1.866 151.831,1.68 151.668,1.506 151.494,1.343 151.308,1.194 151.112,1.058 150.907,0.936 150.694,0.83 150.474,0.738 150.248,0.663 150.017,0.604 149.783,0.562 149.546,0.536 149.323,0.529 149.308,0.53 149.208,0.52 149.176,0.51 15.623,0.51 15.623,23.303 18.731,23.303 18.731,6.858 18.737,6.796 18.755,6.736 18.785,6.681 18.824,6.632 18.873,6.593 18.928,6.563 18.988,6.545 19.05,6.539 122.428,6.539 122.49,6.545 122.55,6.563 122.605,6.593 122.654,6.632 122.693,6.681 122.723,6.736 122.741,6.796 122.747,6.858 122.747,18.604 127,18.604 127.062,18.61 127.122,18.628 127.177,18.658 127.226,18.697 127.265,18.746 127.295,18.801 127.313,18.861 127.319,18.923 127.319,24.892 127.313,24.954 127.295,25.014 127.265,25.069 127.226,25.118 127.177,25.157 127.122,25.187 127.062,25.205 127,25.211 112.268,25.211 112.206,25.205 112.146,25.187 112.091,25.157 112.042,25.118 112.003,25.069 111.973,25.014 111.955,24.954 111.949,24.892 111.949,16.321 27.878,16.321 27.878,31.877 27.872,31.939 27.854,31.999 27.824,32.054 27.785,32.103 27.736,32.142 27.681,32.172 27.621,32.19 27.559,32.196 21.274,32.196 21.274,53.34 21.274,57.593 30.226,57.593 30.288,57.599 30.348,57.617 30.403,57.647 30.452,57.686 30.491,57.735 30.521,57.79 30.539,57.85 30.545,57.912 30.545,66.737 54.61,66.737 54.672,66.743 54.732,66.761 54.787,66.791 54.836,66.83 54.875,66.879 54.905,66.934 54.923,66.994 54.929,67.056 54.929,68.261 118.172,68.261
A+5V on VCC (split plane): 20.636,31.877 20.642,31.815 20.66,31.755 20.69,31.7 20.729,31.651 20.778,31.612 20.833,31.582 20.893,31.564 20.955,31.558 27.24,31.558 27.24,16.002 27.246,15.94 27.264,15.88 27.294,15.825 27.333,15.776 27.382,15.737 27.437,15.707 27.497,15.689 27.559,15.683 112.268,15.683 112.33,15.689 112.39,15.707 112.445,15.737 112.494,15.776 112.533,15.825 112.563,15.88 112.581,15.94 112.587,16.002 112.587,24.573 126.681,24.573 126.681,19.242 122.747,19.242 122.747,22.479 122.741,22.541 122.723,22.601 122.693,22.656 122.654,22.705 122.605,22.744 122.55,22.774 122.49,22.792 122.428,22.798 117.348,22.798 117.286,22.792 117.226,22.774 117.171,22.744 117.122,22.705 117.083,22.656 117.053,22.601 117.035,22.541 117.029,22.479 117.029,11.876 24.068,11.876 24.068,27.726 24.062,27.788 24.044,27.848 24.014,27.903 23.975,27.951 23.926,27.991 23.871,28.02 23.811,28.039 23.749,28.045 15.355,28.045 15.355,53.021 20.636,53.021
A-5V on VCC (split plane): 23.43,11.557 23.436,11.495 23.454,11.435 23.484,11.38 23.523,11.331 23.572,11.292 23.627,11.262 23.687,11.244 23.749,11.238 117.348,11.238 117.41,11.244 117.47,11.262 117.525,11.292 117.574,11.331 117.613,11.38 117.643,11.435 117.661,11.495 117.667,11.557 117.667,22.16 122.109,22.16 122.109,18.923 122.109,7.177 19.369,7.177 19.369,23.622 19.363,23.684 19.345,23.744 19.315,23.799 19.276,23.848 19.227,23.887 19.172,23.917 19.112,23.935 19.05,23.941 15.355,23.941 15.355,27.407 23.43,27.407
A+3.3V on VCC (split plane): 3.716,96.462 29.907,96.462 29.907,67.056 29.907,58.231 20.955,58.231 20.893,58.225 20.833,58.207 20.778,58.177 20.729,58.138 20.69,58.089 20.66,58.034 20.642,57.974 20.636,57.912 20.636,53.659 15.036,53.659 14.974,53.653 14.914,53.635 14.859,53.605 14.811,53.566 14.771,53.517 14.741,53.462 14.723,53.402 14.717,53.34 14.717,27.726 14.717,23.622 14.723,23.56 14.741,23.5 14.771,23.445 14.811,23.396 14.859,23.357 14.914,23.327 14.974,23.309 15.036,23.303 15.111,23.303 15.111,0.51 3.81,0.51 3.793,0.509 3.561,0.518 3.313,0.547 3.069,0.596 2.829,0.663 2.595,0.75 2.369,0.854 2.151,0.976 1.944,1.114 1.748,1.269 1.565,1.438 1.396,1.621 1.241,1.817 1.103,2.024 0.981,2.242 0.877,2.468 0.79,2.702 0.723,2.942 0.674,3.186 0.645,3.434 0.636,3.666 0.637,3.683 0.637,93.383 0.636,93.399 0.645,93.625 0.673,93.865 0.72,94.102 0.786,94.335 0.87,94.562 0.971,94.782 1.089,94.993 1.224,95.194 1.373,95.384 1.538,95.561 1.715,95.726 1.905,95.875 2.106,96.01 2.317,96.128 2.537,96.229 2.764,96.313 2.997,96.379 3.234,96.426 3.474,96.454 3.7,96.463

## Other copper
GND (plane layer: these items are gaps in the copper):
  lines w0.635: 0.762,96.972 0.127,96.972 0.127,5.842 130.429,5.842 130.429,23.241 117.602,23.241 117.602,17.907 17.78,17.907 17.78,56.896 27.813,56.896 27.813,96.972 ; 30.099,96.901 30.099,87.376 30.099,86.36 63.627,86.36 63.627,73.533 129.54,73.533 129.54,54.991 153.162,54.991
VCC (plane layer: these items are gaps in the copper):
  lines w0.508: 15.367,0 15.367,23.622
  lines w0.635: 0.127,38.862 0.127,96.901 0.198,96.972 2.921,96.972 ; 30.226,67.35 30.226,57.912 20.955,57.912 20.955,53.34 ; 30.226,86.36 63.627,86.36 63.627,77.724 66.675,77.724 66.675,87.596 72.263,87.596 72.263,77.089 128.905,77.089 128.905,58.42 153.409,58.42 ; 30.226,96.972 30.226,67.056 54.61,67.056 54.61,68.58 118.491,68.58 118.491,42.672 153.409,42.672 153.409,42.799 ; 15.036,27.726 23.749,27.726 23.749,11.557 117.348,11.557 117.348,22.479 122.428,22.479 122.428,18.923 ; 15.036,27.726 15.036,53.34 20.955,53.34 ; 15.036,27.726 15.036,23.622 19.05,23.622 19.05,6.858 122.428,6.858 122.428,18.923 ; 20.955,53.34 20.955,31.877 27.559,31.877 27.559,16.002 112.268,16.002 112.268,24.892 123.063,24.892 127,24.892 127,18.923 122.428,18.923

## Silkscreen, mask and mechanical layers (free items; w line width, h text height)
Top Overlay:
  text "阀门2" at 102.056,89.408 h1.27
  text "阀门1" at 123.112,89.408 h1.27
  text "温控" at 111.835,89.281 h1.27
  text "泵" at 135.533,89.281 h1.27
  text "温度采集" at 21.209,88.646 h1.27
  text "光源" at 35.433,88.651 h1.27
  text "热敏打印机" at 56.007,88.392 h1.27
  text "GND" at 29.337,31.996 h1.52
  text "SWCLK" at 29.21,28.956 h1.52
  text "SWDIO" at 29.464,26.543 h1.52
  text "D+3.3V" at 29.591,24.122 h1.52
  text "CPU_V1.0" at 22.479,12.065 h5.08
  text "PD" at 14.4,9.398 h1.27
  text "扫码机1" at 71.416,1.27 h1.27
  text "扫码机2" at 100.887,1.016 h1.27
Bottom Overlay:
  text "D+5V" at 18.542,30.353 h1.27
  text "DGND" at 10.414,30.226 h1.27
  text "A+5V" at 18.415,28.448 h1.27
  text "A-5V" at 18.415,26.67 h1.27
  text "AD1" at 8.763,23.876 h1.52
  text "AD2" at 9.017,20.193 h1.52
  text "Sen1" at 18.415,18.288 h1.27
  text "AD3" at 9.144,16.383 h1.52
  text "Sen2" at 18.415,16.383 h1.27
  text "Sen3" at 18.415,14.478 h1.27
  text "Sen4" at 18.415,12.446 h1.27
  text "AD4" at 9.144,12.065 h1.52
Mechanical 1:
  circle w0.013: c149,4 r1.75
  circle w0.013: c149,93 r1.75
  circle w0.013: c4,4 r1.75
  circle w0.013: c16.074,94.134 r1.75
  circle w0.013: c89.353,94.134 r1.75
  lines w0.635: 149.308,0 3.81,0 cw(c3.81,3.683) 0.127,3.683 0.127,93.383 cw(c3.716,93.383) 3.716,96.972 146.763,96.972 cw(c146.763,90.581) 153.154,90.581 153.154,3.866 cw(c149.308,3.866) 149.308,0.02

## Text inside footprints (layer, text, board x,y; h text height)
U5: Top Overlay "VIN" at 138.031,58.166 h0.8 r90